# Altium PCB TOP LAYER 2.PcbDoc
Units mm, origin at the board's own origin, x right, y up, seen from the top; angles counter-clockwise.
Board outline 152.4 x 101.6 mm, 2 copper layers (Top Layer, Bottom Layer); 3 components, 5 nets, 14 pads, 0 vias.
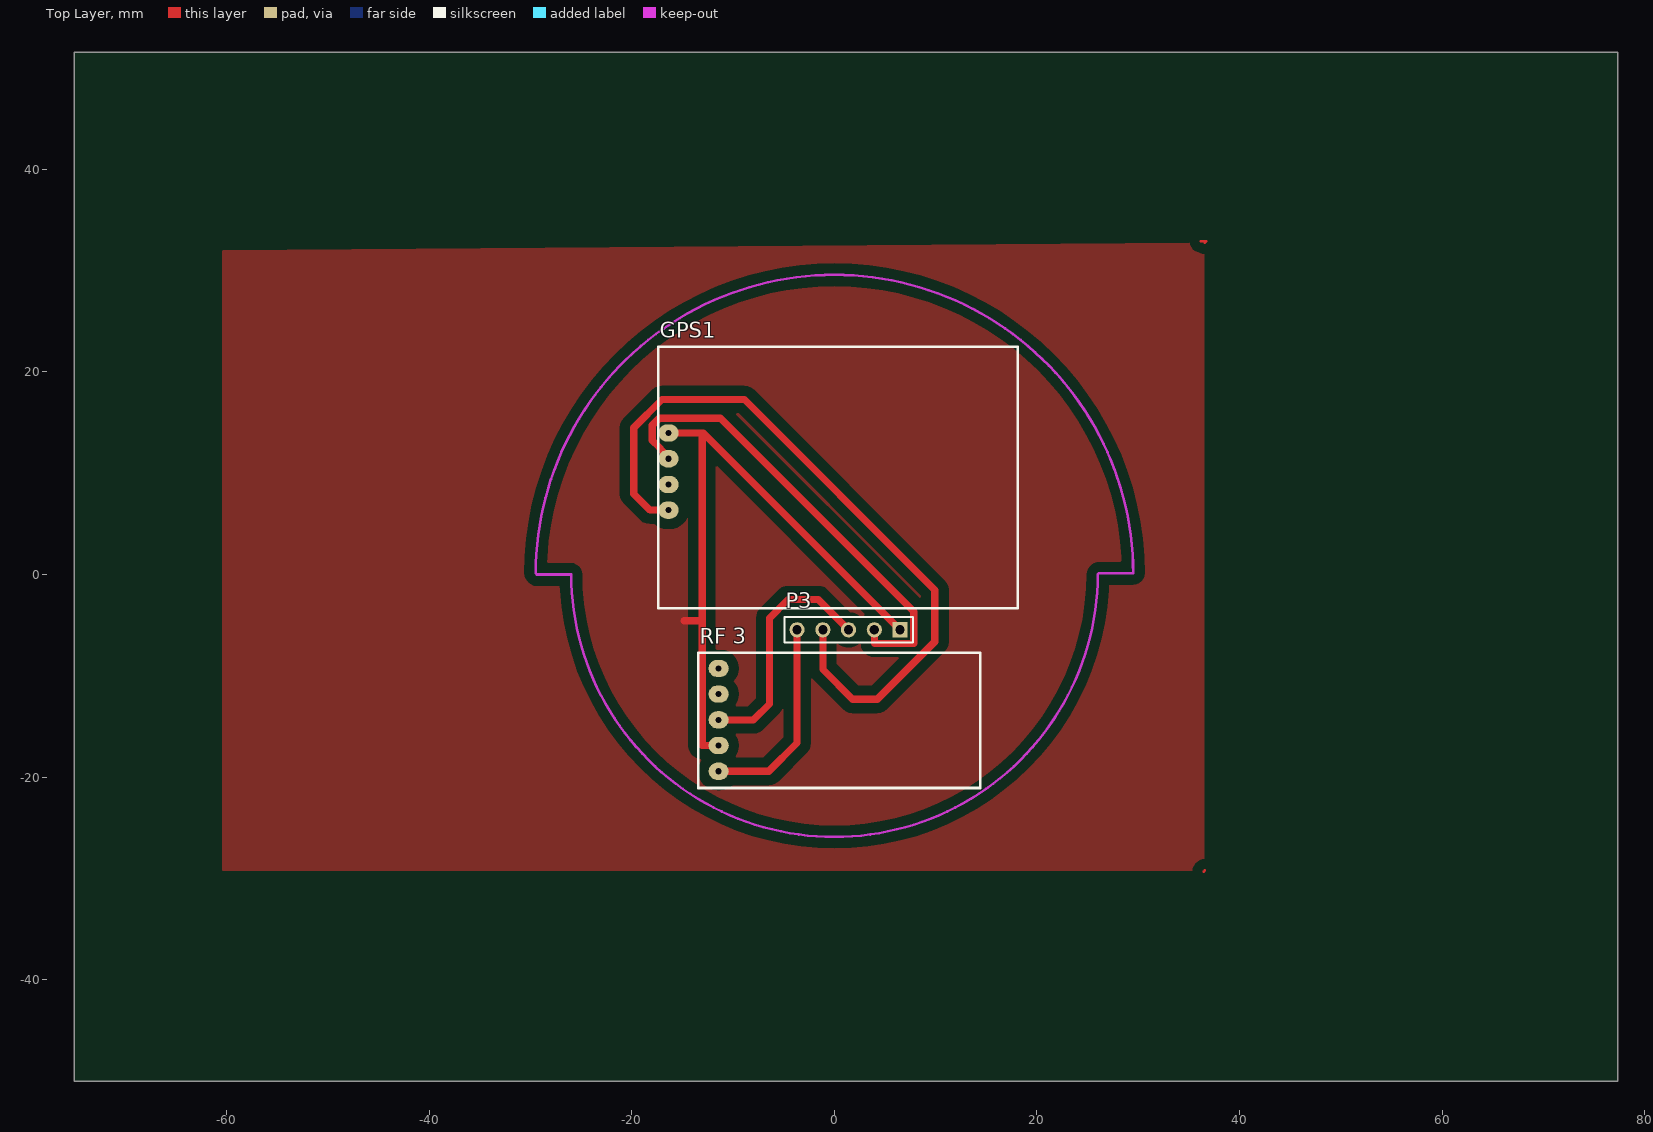
[diagram p0: Top Layer view]
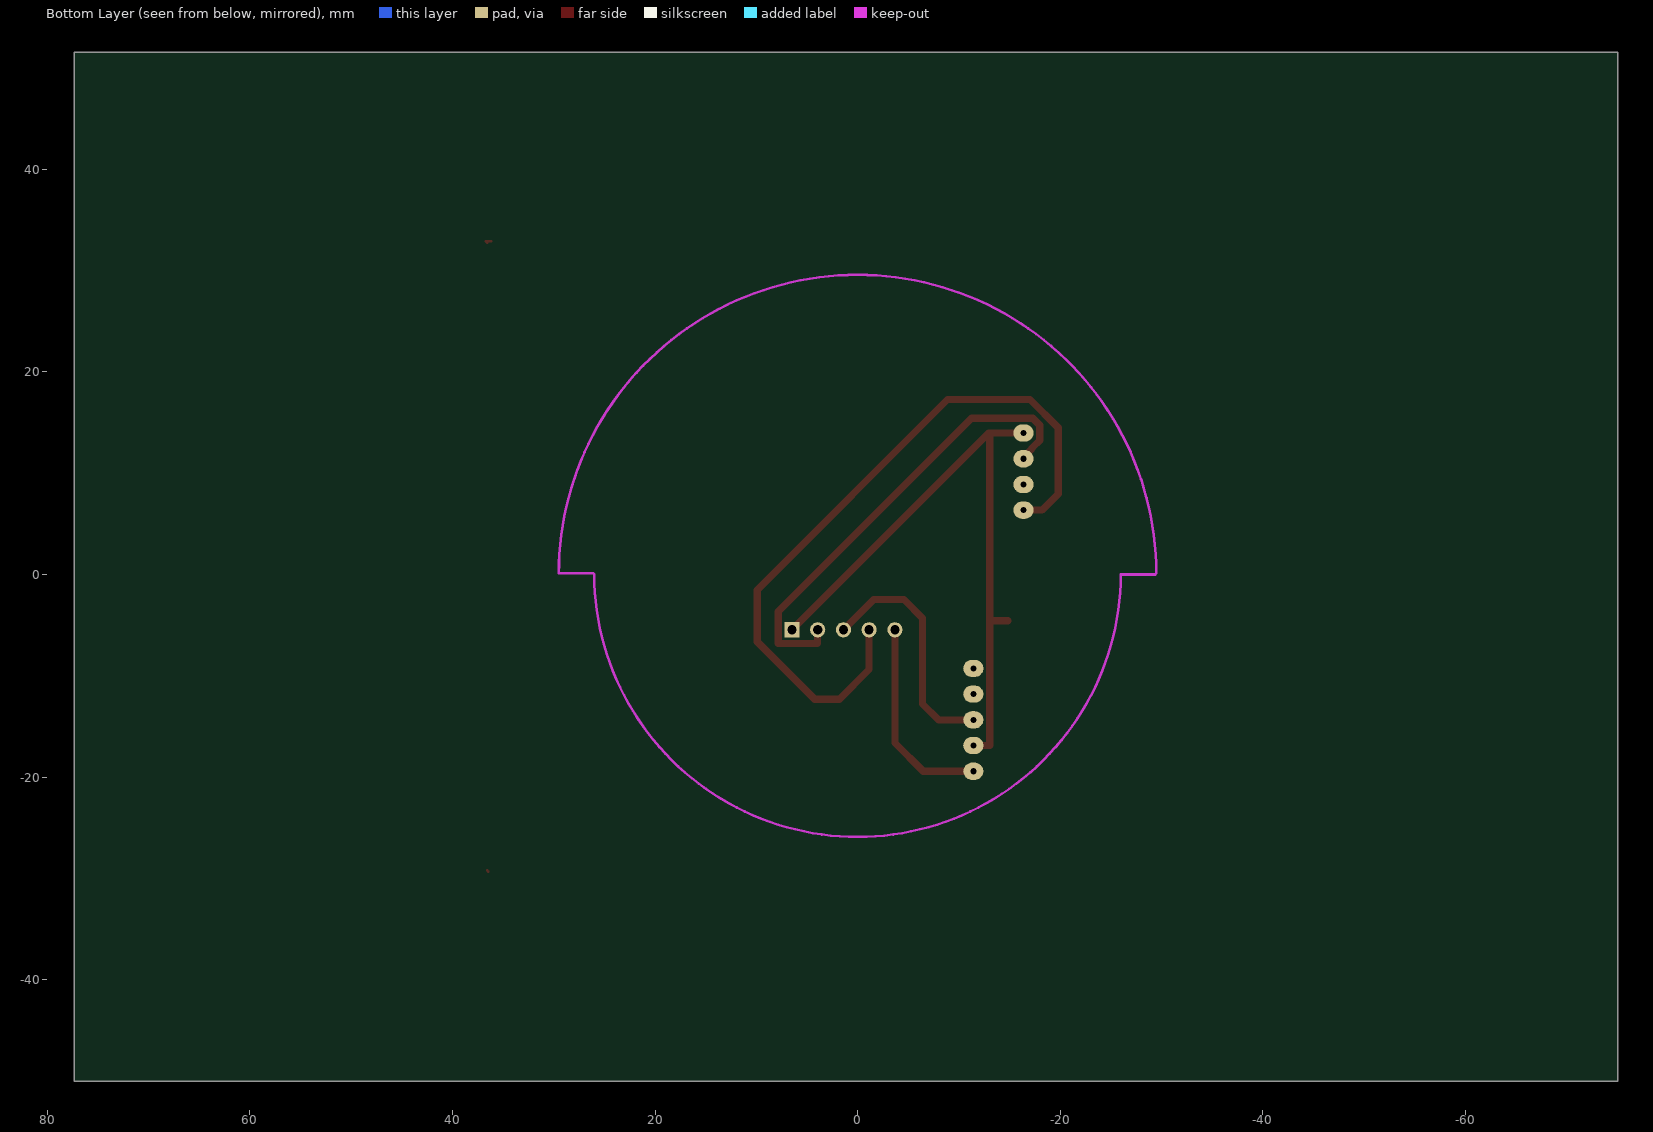
[diagram p1: Bottom Layer view, seen from below]

## Layer stack, top to bottom
Top Solder: solder mask 0.0102, Solder Resist, Dk 3.5
Top Layer: signal copper 0.0356
Dielectric 1: dielectric 0.32, FR-4, Dk 4.8
Bottom Layer: signal copper 0.0356
Bottom Solder: solder mask 0.0102, Solder Resist, Dk 3.5

## Board outline
-75.057,-50.038 77.343,-50.038 77.343,51.562 -75.057,51.562

## Design rules (kind name [scope] priority, off if disabled: settings)
Clearance [All] p1: gap=0.254 ignorepadtopadclearanceinfootprint=FALSE except(0: Arc-Hole Track-Hole SMDPad-Hole THPad-Hole Via-Hole Fill-Hole Poly-Hole Region-Hole Text-Hole; 1: Arc-Fill Arc-Poly Arc-Region Track-Fill Track-Poly Track-Region SMDPad-Fill SMDPad-Poly SMDPad-Region THPad-Fill THPad-Poly THPad-Region Via-Fill Via-Poly Via-Region Fill-Fill Fill-Poly Fill-Region Poly-Poly Poly-Region Region-Region)
PolygonConnect [All] p1: connectstyle=Relief reliefconductorwidth=0.254 reliefentries=4 polygonreliefangle="90 Angle" airgapwidth=0.254
RoutingLayers [All] p1: top layer_v5=TRUE bottom layer_v5=FALSE
RoutingVias [All] p1: holewidth=0.711 width=1.27 viastyle="Through Hole" minholewidth=0.711 minwidth=1.27 maxholewidth=0.711 maxwidth=1.27
SolderMaskExpansion [All] p1: expansion=0.102
Width [All] p1: maxlimit=0.7 minlimit=0.254 preferedwidth=0.7 toplayer_minwidth=0.5 bottomlayer_maxwidth=0.254 bottomlayer_prefwidth=0.254 minimp=50.000000 maximp=50.000000 favimp=50.000000
29 further rules are at their usual default settings.

## Components (designator, comment, footprint, x,y, rotation, side; value= is the part's Value field where it differs from the comment)
GPS1 "GPS" GPS -17.383,22.47 r90 top
P3 "Header 5" HDR1X5 6.477,-5.461 r180 top
"RF 3" "RF" RF -13.43,-9.271 r0 top

## Footprints (in the part's own frame and the unit in brackets; to place one, negate y for a bottom-side part, rotate by r counter-clockwise, add the part's x,y. Pads: shape width x height; smd on the part's side, far side on the other; paste and mask are expansions set on the pad)
GPS [mm]
  oval 1.7x2 hole 0.6: 12(-16.12,-1) 13(-13.58,-1) 14(-11.04,-1) 15(-8.5,-1)
  silkscreen extent -25.8,-35.5 0,0
HDR1X5 [mm] "Connector; Header; 5 Position"
  rect 1.5x1.5 hole 0.9: 1(0,0)
  round 1.5 hole 0.9: 2(2.54,0) 3(5.08,0) 4(7.62,0) 5(10.16,0)
  silkscreen extent -1.27,-1.27 11.43,1.27
RF [mm]
  oval 2x1.7 hole 0.6: 32(2,-10.16) 33(2,-7.62) 34(2,-5.08) 35(2,-2.54) 36(2,0)
  silkscreen extent 0,-11.81 27.81,1.52

## Part data
P3: "Header, 5-Pin", LatestRevisionDate=17-Jul-2002, LatestRevisionNote="Re-released for DXP Platform.", Publisher="Altium Limited"

## Nets (pads, with @x,y where several pads share a name; then routed paths per layer and width w, separated by ;. In a path a pad name is that pad's centre, name@x,y a point inside that pad or via, vN(x,y) a via of type N, cw(c..) or ccw(c..) an arc to the next point about the centre after c; other vN are vias at no path point)
NetGPS1_12: GPS1.12 P3.4 | length 73
  Top Layer w0.7: GPS1.12 -18.225,6.35 -19.812,7.937 -19.812,14.496 -17.036,17.272 -8.89,17.272 9.906,-1.524 9.906,-6.648 4.235,-12.319 1.778,-12.319 -1.143,-9.398 P3.4
NetGPS1_14: GPS1.14 P3.2 | length 46.3
  Top Layer w0.7: GPS1.14 -17.272,12.522 -17.987,13.237 -17.987,14.732 -17.295,15.424 -11.233,15.424 7.831,-3.64 7.831,-6.815 3.937,-6.815 P3.2
NetGPS1_15: "RF 3.33" GPS1.15 P3.1 | length 65.2
  Top Layer w0.7: GPS1.15 -13.056,13.97 ; -14.859,-4.572 -13.056,-4.572 ; -11.43,-16.891 -13.056,-16.891 -13.056,-4.572 ; P3.1 -12.954,13.97 -13.056,13.97 ; -13.056,-4.572 -13.056,13.97
NetP3_3: "RF 3.34" P3.3 | length 24
  Top Layer w0.7: -11.43,-14.351 -7.976,-14.351 -6.426,-12.802 -6.426,-4.318 -4.572,-2.464 -1.6,-2.464 P3.3
NetP3_5: "RF 3.32" P3.5 | length 20.1
  Top Layer w0.7: -11.43,-19.431 -6.477,-19.431 -3.683,-16.637 P3.5
pads on no net: "RF 3.35" "RF 3.36" GPS1.13
copper on no net: | length 0.9
  Top Layer w0.254: 36.195,32.893 36.703,32.893 36.576,32.766 ; 36.449,-29.337 36.576,-29.21

## Polygon pours and split planes (outlines as drawn)
no net on Top Layer "Top Layer-No Net" (solid, pour order 4): 36.576,32.766 36.512,32.703 36.512,-29.273 -60.389,-29.273 -60.452,-29.21 -60.452,31.877 -60.579,32.004
no net on Top Layer "Top Layer-No Net 1" (solid, pour order 0): 38.608,37.084

## Keep-outs
Keep-Out Layer:
  lines w0.254: -29.5,0.123 cw(c0,0.087) 29.5,0.123 26.123,0.123 ; -29.377,0 -26,0 ccw(c0,0.087) 26,0